# Altium PCB lcd_breakout.PcbDoc
Units mm, origin at the board's own origin, x right, y up, seen from the top; angles counter-clockwise.
Board outline 46.2 x 48.4 mm, 2 copper layers (Top Layer, Bottom Layer), stack 1.335 mm thick; 21 components, 20 nets, 74 pads, 11 vias.
Unrouted connection lines stored in the file: 21.
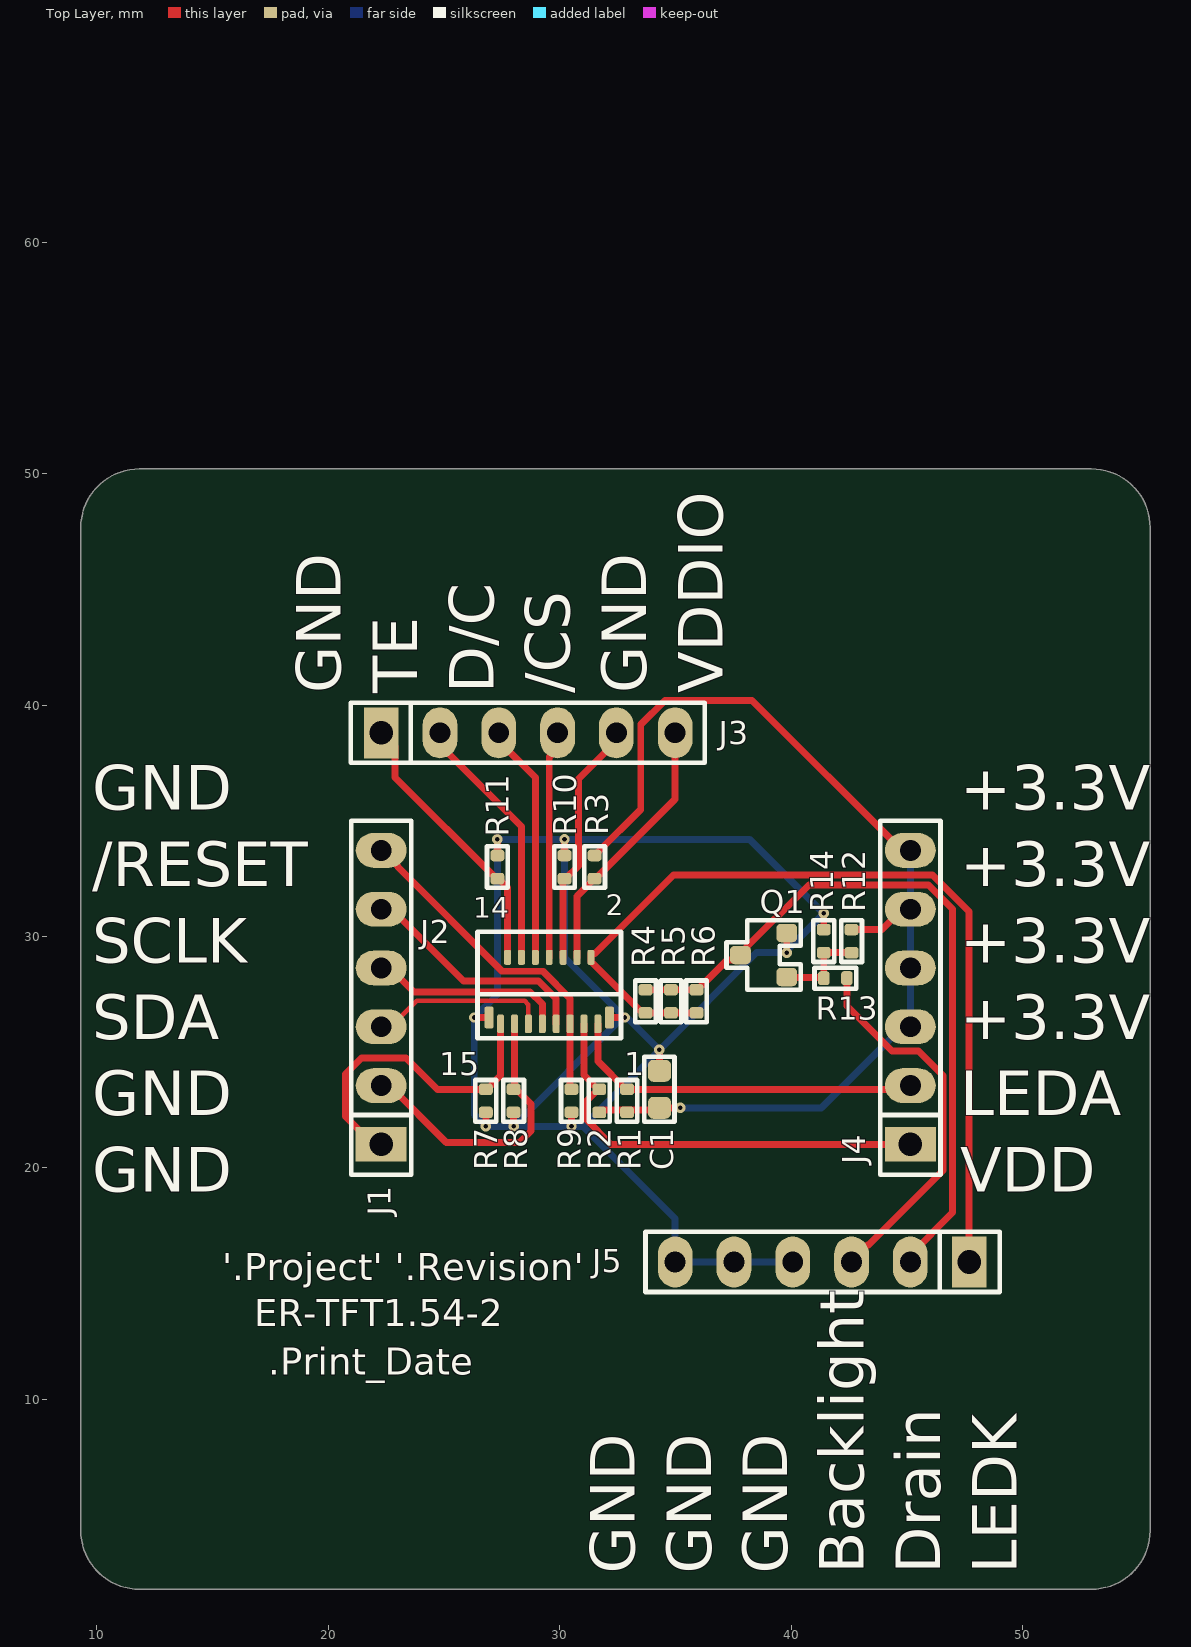
[diagram p0: Top Layer view]
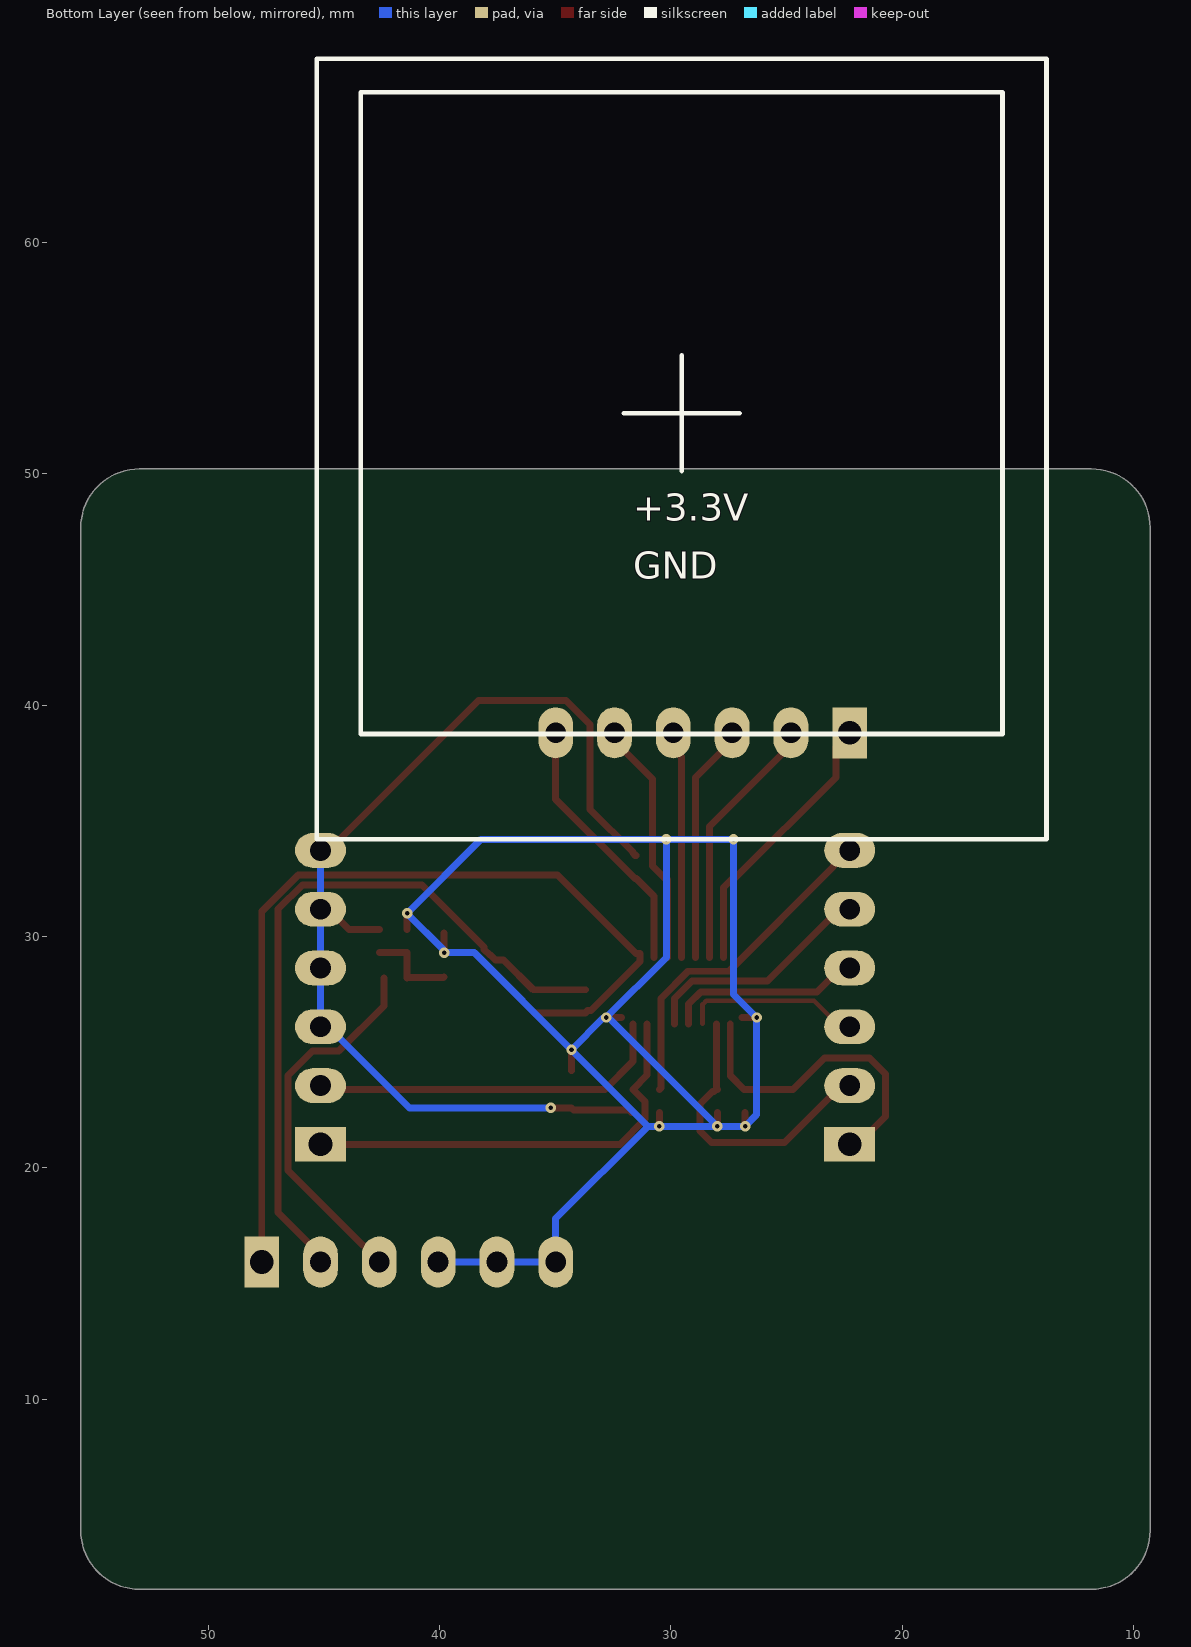
[diagram p1: Bottom Layer view, seen from below]
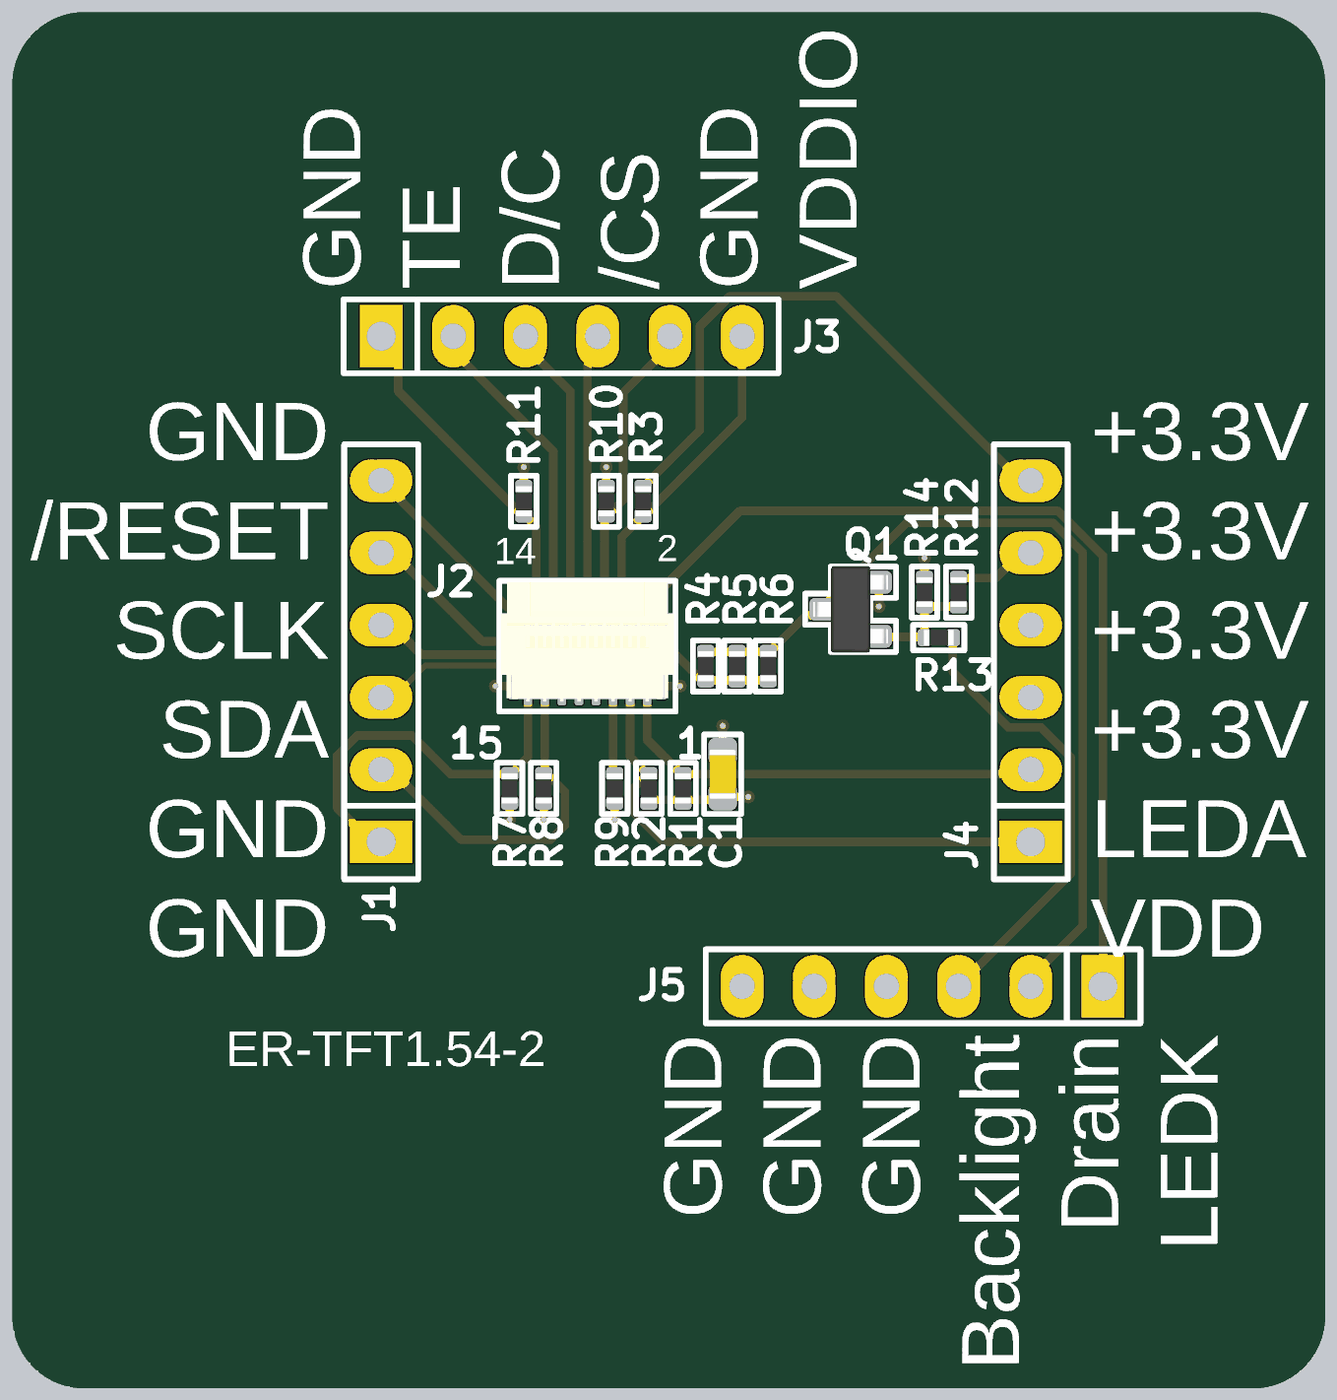
[diagram p2: 3D render of the assembled board from above, using the file's embedded part models]

## Layer stack, top to bottom
Top Solder: solder mask 0.0152, Solder Resist, Dk 3.8
Top Layer: signal copper 0.035
Core: core 1.265, FR-4, Dk 4.6
Bottom Layer: signal copper 0.035
Bottom Solder: solder mask 0.0152, Solder Resist, Dk 3.8

## Board outline
52.96,1.8 ccw(c52.96,4.34) 55.5,4.34 55.5,47.66 ccw(c52.96,47.66) 52.96,50.2 11.84,50.2 ccw(c11.84,47.66) 9.3,47.66 9.3,4.34 ccw(c11.84,4.34) 11.84,1.8

## Design rules (kind name [scope] priority, off if disabled: settings)
BoardOutlineClearance ignore_silkscreen [OnLayer('Top Overlay') OR OnLayer('Bottom Overlay')] p1: gap=0 ignorepadtopadclearanceinfootprint=FALSE
BoardOutlineClearance [All] p2: gap=0.2 ignorepadtopadclearanceinfootprint=FALSE
Clearance HV_clearance [InNetClass('HV')] p1: gap=0.1 ignorepadtopadclearanceinfootprint=TRUE except(0.5: Arc-Arc Arc-Track Arc-SMDPad Arc-THPad Arc-Via Arc-Fill Arc-Poly Arc-Region Arc-Text Arc-Hole Track-Track Track-SMDPad Track-THPad Track-Via Track-Fill Track-Poly Track-Region Track-Text Track-Hole; 1.2: SMDPad-SMDPad SMDPad-THPad THPad-THPad)
Clearance 24v_clearance [InNet('+24V') or InNet('NetJ1_2') or InNet('NetJ3_2')] p2: gap=0.3 ignorepadtopadclearanceinfootprint=TRUE
Clearance 12v_clearance [InNet('+12V') or InNet('+12V_SWITCHED') or InNet('VBUS')] p3: gap=0.2 ignorepadtopadclearanceinfootprint=TRUE
Clearance 5v_polygon_clearance_1 [(InNet('+5V') AND InPolygon)] p4: gap=0.254 ignorepadtopadclearanceinfootprint=FALSE
Clearance fiducial [HasFootprint('fiducial-0.5')] p5: gap=0.5 ignorepadtopadclearanceinfootprint=FALSE
Clearance outer_layer_clearance [OnLayer('Bottom Layer')   OR OnLayer('Top Layer')] p6: gap=0.127 ignorepadtopadclearanceinfootprint=TRUE except(0.152: Arc-THPad Arc-Via Arc-Text Arc-Hole Track-THPad Track-Via Track-Text Track-Hole SMDPad-SMDPad SMDPad-THPad SMDPad-Via SMDPad-Text SMDPad-Hole THPad-Text Via-Text Fill-Text Fill-Hole Poly-Text Poly-Hole Region-Text Region-Hole Text-Text Text-Hole; 0.231: Via-Hole; 0.356: THPad-THPad THPad-Via THPad-Hole)
Clearance inner_layer_clearance [All] p7: gap=0.152 ignorepadtopadclearanceinfootprint=TRUE except(0.102: Arc-Arc Arc-Track Track-Track; 0.127: Arc-Fill Arc-Poly Arc-Region Track-Fill Track-Poly Track-Region SMDPad-Fill SMDPad-Poly SMDPad-Region THPad-Fill THPad-Poly THPad-Region Via-Via Via-Fill Via-Poly Via-Region Fill-Fill Fill-Poly Fill-Region Poly-Poly Poly-Region Region-Region; 0.231: Via-Hole; 0.356: THPad-THPad THPad-Via THPad-Hole)
ComponentClearance fiducial_clearance [HasFootprint('FIDUCIAL')] p1: gap=0 collisioncheckmode=3 verticalgap=0 showdistances=FALSE
ComponentClearance [All] p2: gap=0.254 collisioncheckmode=3 verticalgap=0.254 showdistances=FALSE
DiffPairsRouting [All] p1: maxlimit=0.127 minlimit=0.127 mostfreqgap=0.127 toplayer_minwidth=0.179 toplayer_maxwidth=0.179 toplayer_prefwidth=0.383 bottomlayer_minwidth=0.179 bottomlayer_maxwidth=0.179 bottomlayer_prefwidth=0.383 impedanceprofiledriven=TRUE impedanceprofileid={7E14F61A-B919-4185-869E-9338D35A9579} impedanceprofilevalue=90.000000 maxuncoupledlength=12.7
HoleSize [All] p1: absolutevalues=TRUE maxlimit=6.3 minlimit=0.2 maxpercent=80.000 minpercent=20.000
HoleToHoleClearance via-to-via_clearance [IsVia] p1: gap=0.2 allowstackedmicrovias=TRUE
HoleToHoleClearance [All] p2: gap=0.35 allowstackedmicrovias=TRUE
MinimumAnnularRing usb-c [HasFootprint('USB_C_2.0_M12')] p1: minimumring=0.125
MinimumAnnularRing via_annular_ring [IsVia] p2: minimumring=0.1
MinimumAnnularRing annular_ring [All] p3: minimumring=0.2
MinimumSolderMaskSliver [All] p1: minsoldermaskwidth=0.046
PlaneConnect [All] p1: planeconnectstyle=Direct reliefexpansion=0.508 reliefentries=4 reliefconductorwidth=0.254 reliefairgap=0.254
PolygonConnect trinamic [InPadClass('thermal_pad')] p1: connectstyle=Direct reliefconductorwidth=0.254 reliefentries=4 polygonreliefangle="90 Angle" airgapwidth=0.254
PolygonConnect mounting_holes [HasFootprint('m3_hole')] p2: connectstyle=Direct reliefconductorwidth=0.254 reliefentries=4 polygonreliefangle="90 Angle" airgapwidth=0.254
PolygonConnect 5v_polygons [InNet('+5V')] p3: thpad.connectstyle=Relief thpad.reliefconductorwidth=0.508 thpad.reliefentries=4 thpad.polygonreliefangle="45 Angle" thpad.airgapwidth=0.254 smdpad.connectstyle=Relief smdpad.reliefconductorwidth=0.508 smdpad.reliefentries=4 smdpad.polygonreliefangle="90 Angle" smdpad.airgapwidth=0.254 via.connectstyle=Direct via.reliefconductorwidth=0.254 via.reliefentries=4 via.polygonreliefangle="90 Angle" via.airgapwidth=0.254
PolygonConnect [All] p4: thpad.connectstyle=Relief thpad.reliefconductorwidth=0.254 thpad.reliefentries=4 thpad.polygonreliefangle="45 Angle" thpad.airgapwidth=0.254 smdpad.connectstyle=Relief smdpad.reliefconductorwidth=0.254 smdpad.reliefentries=4 smdpad.polygonreliefangle="90 Angle" smdpad.airgapwidth=0.254 via.connectstyle=Direct via.reliefconductorwidth=0.254 via.reliefentries=4 via.polygonreliefangle="45 Angle" via.airgapwidth=0.254
RoutingVias [All] p1: holewidth=0.2 width=0.45 viastyle="Through Hole" minholewidth=0.2 minwidth=0.45 maxholewidth=0.3 maxwidth=3
SilkToSilkClearance [All] p1: silktosilkclearance=0
SilkToSolderMaskClearance [IsPad] p1: minsilkscreentomaskgap=0.075 clearancetoexposedcopper=TRUE
SolderMaskExpansion ViaTenting [IsVia] p1: expansion=0.05 istentingtop=TRUE
SolderMaskExpansion [All] p2: expansion=0.05 istentingtop=FALSE
SupplyNets "Schematic Supply Nets_3" [InNet('GND')] p1: voltage=0.000
SupplyNets "Schematic Supply Nets_1" [InNet('+3.3V')] p2: voltage=0.000
Width [All] p1: maxlimit=3 minlimit=0.089 preferedwidth=0.203
22 further rules are at their usual default settings.

## Components (designator, comment, footprint, x,y, rotation, side; value= is the part's Value field where it differs from the comment)
C1 "CL10A106MA8NRNC" 0603_capacitor 34.3,23.4 r270 top value=10µF
J1 "*" 69190-106HLF 22.28,26.1 r90 top
J2 "ER-TFT1.54-2 LCD" FH35C-15S-0.3SHW(50) 29.54,27.7 r0 top
J3 "*" 69190-106HLF 27.36,38.8 r0 top
J4 "*" 69190-106HLF 45.14,26.1 r90 top
J5 "*" 69190-106HLF 42.6,15.94 r180 top
Q1 "DMN3404L-7" SOT-23-3 38.8,29.2 r180 top
R1 "RMCF0402ZT0R00" 0402_resistor 32.9,22.9 r270 top
R2 "RMCF0402ZT0R00" 0402_resistor 31.7,22.9 r270 top
R3 "RMCF0402ZT0R00" 0402_resistor 31.5,33 r90 top
R4 "RMCF0402FT27R0" 0402_resistor 33.7,27.2 r90 top
R5 "RMCF0402FT27R0" 0402_resistor 34.8,27.2 r90 top
R6 "RMCF0402FT27R0" 0402_resistor 35.9,27.2 r90 top
R7 "RMCF0402ZT0R00" 0402_resistor 26.8,22.9 r90 top
R8 "RMCF0402ZT0R00" 0402_resistor 28,22.9 r90 top
R9 "RMCF0402ZT0R00" 0402_resistor 30.5,22.9 r90 top
R10 "RMCF0402ZT0R00" 0402_resistor 30.2,33 r270 top
R11 "RMCF0402ZT0R00" 0402_resistor 27.3,33 r270 top
R12 "RMCF0402FT10K0" 0402_resistor 42.6,29.8 r270 top
R13 "RMCF0402FT100R" 0402_resistor 41.9,28.2 r180 top
R14 "RMCF0402FT10K0" 0402_resistor 41.4,29.8 r90 top

## Footprints (in the part's own frame and the unit in brackets; to place one, negate y for a bottom-side part, rotate by r counter-clockwise, add the part's x,y. Pads: shape width x height; smd on the part's side, far side on the other; paste and mask are expansions set on the pad)
0402_resistor [mm] "Chip Resistor, 2-Leads, Body 1.00x0.50mm, IPC Medium Density"
  rrect50% 0.5x0.6 smd: 1(-0.5,0) 2(0.5,0)
  silkscreen extent -0.9,-0.45 0.9,0.45, body extent -0.53,-0.28 0.53,0.28, height 0.4
0603_capacitor [mm] "Chip Capacitor, 2-Leads, Body 1.60x0.80mm, IPC Medium Density"
  rrect50% 0.95x1 smd: 1(-0.8,0) 2(0.8,0)
  silkscreen extent -1.4,-0.65 1.4,0.65, body extent -0.87,-0.48 0.87,0.48, height 0.87
69190-106HLF [mm] "6-pin 0.1\" header"
  rect 1.5x2.2 hole 1.02: 1(-5.08,0)
  oval 1.5x2.2 hole 0.9: 2(-2.54,0) 3(0,0) 4(2.54,0) 5(5.08,0) 6(7.62,0)
  silkscreen extent -6.4,-1.3 8.9,1.3
FH35C-15S-0.3SHW(50) [mm] "Flat flex connector"
  rrect50% 0.3x0.8 smd: 1(2.1,-1.475) 3(1.5,-1.475) 5(0.9,-1.475) 7(0.3,-1.475) 9(-0.3,-1.475) 11(-0.9,-1.475) 13(-1.5,-1.475) 15(-2.1,-1.475)
  rrect50% 0.3x0.65 smd: 2(1.8,1.4) 4(1.2,1.4) 6(0.6,1.4) 8(0,1.4) 10(-0.6,1.4) 12(-1.2,1.4) 14(-1.8,1.4)
  rrect50% 0.4x0.95 smd: MP(-2.6,-1.2) MP(2.6,-1.2)
  silkscreen extent -3.1,-2.1 3.1,2.5, body extent -15.76,-6.5 15.76,40.22, height 1.9
SOT-23-3 [mm]
  rrect50% 0.9x0.8 smd: 1(-1,0.95) 2(-1,-0.95) 3(1,0)
  silkscreen extent -1.6,-1.5 1.6,1.5, body extent -1.32,-1.52 1.32,1.52, height 1.22

## Part data
C1: "10 µF, 25 V, X5R, 0603 Chip capacitor", Case Code (Imperial)=0603, Case Code (Metric)=1608, Manufacturer=Samsung, Max Operating Temperature=85°C, Min Operating Temperature=-55°C, Tolerance=20%, Voltage Rating=25V, Case/Package=0603, Category="Ceramic Capacitors", ComponentLink1Description=https://datasheet.ciiva.com/25766/cl10a106ma8nrnc-25766562.pdf?src-supplier=Digikey, ComponentLink1URL=https://datasheet.ciiva.com/25766/cl10a106ma8nrnc-25766562.pdf?src-supplier=Digikey, Height=900um, house_part_number=C-10uF-0603-002, Lead Free="Lead Free", Manufacturer Part Number=CL10A106MA8NRNC, Material=4241ConductorMaterial, Mounting Technology="Surface Mount", Packaging="Cut Tape", Pricing="4000=0.0511, 8000=0.046, 12000=0.0434, 28000=0.0413, 100000=0.0356 (USD)", RoHS=Yes, RoHS Compliant=Yes, Series=CL, Stock=632000, Supplier 1="Arrow Electronics", Supplier Part Number 1=CL10A106MA8NRNC
J1 J3 J4 J5: library part 69190-106HLF, "6-Pin 0.1\" unshrouded header pins", Flammability Rating="UL94 V-0", Insulation Color=Black, Manufacturer="Amphenol ICC / FCI", Manufacturer Series=69190, Supplier Part Number 1=649-69190-106HLF, Body Breadth=0.095inch, Body Depth=0.1inch, Body Length=0.6inch, Category=Connectors, ComponentLink1Description=https://datasheet.ciiva.com/721/69190-721132.pdf?src-supplier=Digikey, ComponentLink1URL=https://datasheet.ciiva.com/721/69190-721132.pdf?src-supplier=Digikey, Connector Type="BOARD CONNECTOR", Contact Finish - Termination="GOLD (30) OVER NICKEL/NICKEL PALLADIUM GOLD (30) OVER NICKEL", Contact Gender=Male, Contact Material=Bronze, Contact Pattern=RECTANGULAR, Contact Style="SQ PIN-SKT", DIN Conformance=No, Filter Feature=No, IEC Conformance=No, JESD-609 Code=e4, Manufacturer Part Number=69190-106HLF, Mating Contact Pitch=0.1inch, MIL Conformance=No, Mixed Contacts=No, Mounting Option 1=LOCKING, Mounting Style=STRAIGHT, Mounting Technology=Board, Number Of Connectors=1, Number of Contacts=6, Number Of PCB Rows=1, Number of Rows Loaded=1, Option="General Purpose", PCB Contact Pattern=RECTANGULAR, Plating Thickness=30uin, Pricing 1="1=0.67, 10=0.521, 50=0.521, 100=0.457, 1000=0.343, 10000=0.309 (USD)", Reach SVHC Compliant=Yes, Reference Standard=UL, Reliability=COMMERCIAL, RoHS=Yes, RoHS Compliant=Yes, Supplier 1=Mouser, Terminal Length=0.12inch, Terminal Pitch=2.54mm, Termination=Solder
J2: library part "LCD Connector", "ER-TFT1.54-2 1.54\" IPS LCD, 240x240, ST7789 controller, FH35C-15S-0.3SHW(50) connector", Contact Resistance=100mR, Dielectric Withstanding Voltage (AC)=90V, Insulation Resistance=50MR, Manufacturer=HRS, Manufacturer Part Number=FH35C-15S-0.3SHW(50), Max Operating Temperature=85°C, Min Operating Temperature=-55°C, Rated Current (Signal)=200mA, Supplier Part Number 1=26-FH35C-15S-0.3SHW(50)CT-ND, Body Breadth=0.035inch, Body Depth=0.132inch, Body Length=0.24inch, Category="FFC / FPC", ComponentLink1Description=https://datasheet.ciiva.com:443/pdfs/VipMasterIC/IC/HIRO/HIRO-S-A0001800865/HIRO-S-A0001800865-1.pdf?src-supplier=IHS+Markit, ComponentLink1URL=https://datasheet.ciiva.com:443/pdfs/VipMasterIC/IC/HIRO/HIRO-S-A0001800865/HIRO-S-A0001800865-1.pdf?src-supplier=IHS+Markit, ComponentLink2Description=https://datasheet.ciiva.com/29758/ed-fh35c-20140305-29758967.pdf?src-supplier=Digikey, ComponentLink2URL=https://datasheet.ciiva.com/29758/ed-fh35c-20140305-29758967.pdf?src-supplier=Digikey, Connector Type="CARD EDGE CONNECTOR", Contact Finish - Mating="AU ON NI", Contact Material=Bronze, Contact Pattern=STAGGERED, Contact Style="BELLOWED TYPE", Durability=10Cycles, Mating Contact Pitch=0.024inch, Mounting Option 1=LOCKING, Mounting Style="RIGHT ANGLE", Mounting Technology=Board, Number of Contacts=15, Number Of PCB Rows=2, Number of Rows Loaded=2, PCB Contact Pattern=STAGGERED, PCB Contact Row Spacing=2.8702mm, Pricing 1="1=1.87, 10=1.525, 25=1.4056, 50=1.3216, 100=1.2428, 250=1.14576, 500=1.07746, 1000=1.01326, 2500=0.9375 (USD)", Reliability=COMMERCIAL, RoHS Compliant=Yes, Stock 1=3489, Supplier 1=Digikey, Terminal Pitch=0.6096mm, Termination=SMD/SMT
Q1: "N-FET, 30 V, 5.8 A, SOT-23-3", Drain Current-Max (Abs) (ID)=5.8A, Drain-source On Resistance-Max=28mR, DS Breakdown Voltage-Min=30V, Manufacturer=Diodes, Max Operating Temperature=150°C, Operating Mode="ENHANCEMENT MODE", Package=SOT-23-3, Package Body Material=Plastic, Package Shape=Rectangular, Package Style="SMALL OUTLINEMeter", Peak Reflow Temperature (Cel)=260°C, Power Dissipation-Max (Abs)=1.4W, Pulsed Drain Current-Max (IDM)=30A, Supplier Part Number 1=DMN3404LDITR-ND, Time @ Peak Reflow Temperature-Max (s)=40s, Additional Feature="HIGH RELIABILITY", Category=MOSFETs, ComponentLink1Description=https://datasheet.ciiva.com:443/pdfs/VipMasterIC/IC/DIOD/DIODS20277/DIODS20277-1.pdf?src-supplier=IHS+Markit, ComponentLink1URL=https://datasheet.ciiva.com:443/pdfs/VipMasterIC/IC/DIOD/DIODS20277/DIODS20277-1.pdf?src-supplier=IHS+Markit, ComponentLink2Description=https://datasheet.ciiva.com/4444/ds31787-65102-4444489.pdf?src-supplier=Mouser, ComponentLink2URL=https://datasheet.ciiva.com/4444/ds31787-65102-4444489.pdf?src-supplier=Mouser, ComponentLink3Description=https://datasheet.ciiva.com/8115/ds31787-8115384.pdf?src-supplier=Avnet, ComponentLink3URL=https://datasheet.ciiva.com/8115/ds31787-8115384.pdf?src-supplier=Avnet, ComponentLink4Description=https://datasheet.ciiva.com/16508/ds31787-16508477.pdf?src-supplier=Future+Electronics, ComponentLink4URL=https://datasheet.ciiva.com/16508/ds31787-16508477.pdf?src-supplier=Future+Electronics, ComponentLink5Description=https://datasheet.ciiva.com/8023/ds31787-8023981.pdf?src-supplier=Element14, ComponentLink5URL=https://datasheet.ciiva.com/8023/ds31787-8023981.pdf?src-supplier=Element14, ComponentLink6Description=https://datasheet.ciiva.com/934/ds31787-934594.pdf?src-supplier=Digi-Key, ComponentLink6URL=https://datasheet.ciiva.com/934/ds31787-934594.pdf?src-supplier=Digi-Key, ComponentLink7Description=https://datasheet.ciiva.com/934/ds31787-934595.pdf?src-supplier=Digi-Key, ComponentLink7URL=https://datasheet.ciiva.com/934/ds31787-934595.pdf?src-supplier=Digi-Key, ComponentLink8Description=https://datasheet.ciiva.com/934/ds31787-934593.pdf?src-supplier=Digi-Key, ComponentLink8URL=https://datasheet.ciiva.com/934/ds31787-934593.pdf?src-supplier=Digi-Key, Drain Current-Max (ID)=5.8A, FET Technology="METAL-OXIDE SEMICONDUCTOR", JESD-30 Code=R-PDSO-G3, JESD-609 Code=e3, Manufacturer Part Number=DMN3404L-7, Moisture Sensitivity Level=1, Number of Elements=1, Pins=3, Polarity/Channel Type=N-CHANNEL, Pricing 1="3000=0.07535, 6000=0.06781, 15000=0.06028, 30000=0.05651, 75000=0.05011, 150000=0.04822 (USD)", Qualification Status="Not Qualified", Reach SVHC Compliant=Yes, RoHS=Yes, RoHS Compliant=Yes, Stock 1=150000, Supplier 1=Digi-Key, Surface Mount=Yes, Terminal Finish=Tin, Terminal Form="Gull Wing", Terminal Position=DUAL, Transistor Application=SWITCHING, Transistor Element Material=SILICON
R1 R2 R3 R7 R8 R9 R10 R11: "0 Ω, 0402 Jumper", Case Code (Imperial)=0402, Case Code (Metric)=1005, Current Rating=1A, Manufacturer="Stackpole Electronics", Max Operating Temperature=155°C, Max Power Dissipation=63mW, Min Operating Temperature=-55°C, Resistance=0Ω, Resistor Type="Thick Film", Supplier Part Number 1=RMCF0402ZT0R00CT-ND, Working Voltage=50V, Case/Package=0402, Category="Chip SMD Resistors", ComponentLink1Description=https://datasheet.ciiva.com/26835/getdatasheetpartid-409751-26835612.pdf?src-supplier=Verical, ComponentLink1URL=https://datasheet.ciiva.com/26835/getdatasheetpartid-409751-26835612.pdf?src-supplier=Verical, Construction=Rectangular, Contact Plating=Tin,Matte, Depth=0.5mm, Features="Automotive AEC-Q200", Height=0.016inch, house_part_number=JP-0402-001, Lead Free="Lead Free", Length=0.039inch, Manufacturer Part Number=RMCF0402ZT0R00, Military Standard=Not, Mount="Surface Mount", Number of Terminations=2, Packaging="Tape and Reel", Power Rating=63mW, Pricing 1="1=0.10000, 10=0.01000, 25=0.00720, 50=0.00560, 100=0.00410, 250=0.00316, 500=0.00252, 1000=0.00186, 5000=0.00133 (USD)", Radiation Hardening=No, RoHS=Yes, RoHS Compliant=Yes, Series=RMCF, Stock 1=6500003, Supplier 1=Digi-Key, Technology="THICK FILM", Width=0.02inch
R4 R5 R6: "27 Ω, 0402 Chip resistor", Manufacturer="Stackpole Electronics", Max Operating Temperature=155°C, Min Operating Temperature=-55°C, Package Height=0.3mm, Package Length=1mm, Package Shape=Rectangular, Package Style=SMTMeter, Package Width=0.5mm, Rated Power Dissipation (P)=63mW, Rated Temperature=70°C, Resistance=27Ω, Resistor Type="FIXED RESISTOR", Supplier Part Number 1=RMCF0402FT27R0CT-ND, Temperature Coefficient=100ppm/°C, Tolerance=1%, Working Voltage=50V, Category="Chip SMD Resistors", ComponentLink1Description=https://datasheet.ciiva.com:443/pdfs/VipMasterIC/IC/SEIE/SEIE-S-A0009541969/SEIE-S-A0009541969-1.pdf?src-supplier=IHS+Markit, ComponentLink1URL=https://datasheet.ciiva.com:443/pdfs/VipMasterIC/IC/SEIE/SEIE-S-A0009541969/SEIE-S-A0009541969-1.pdf?src-supplier=IHS+Markit, ComponentLink2Description=https://www.seielect.com/catalog/SEI-RMCF_RMCP.pdf?src-supplier=Avnet, ComponentLink2URL=https://www.seielect.com/catalog/SEI-RMCF_RMCP.pdf?src-supplier=Avnet, ComponentLink3Description=https://www.seielect.com/catalog/sei-rmcf_rmcp.pdf?src-supplier=Digi-Key, ComponentLink3URL=https://www.seielect.com/catalog/sei-rmcf_rmcp.pdf?src-supplier=Digi-Key, ComponentLink4Description=http://www.seielect.com/Catalog/SEI-RMCF_RMCP.pdf?src-supplier=Digi-Key, ComponentLink4URL=http://www.seielect.com/Catalog/SEI-RMCF_RMCP.pdf?src-supplier=Digi-Key, Construction=Rectangular, house_part_number=R-27-0402-1%-001, JESD-609 Code=e3, Manufacturer Part Number=RMCF0402FT27R0, Mount="Surface Mount", Number of Pins=2, Packaging="Tape and Reel", Pricing 1="1=0.10000, 10=0.01500, 100=0.00610, 1000=0.00274, 2500=0.00238, 5000=0.00197 (USD)", REACH SVHC=Yes, Reference Standard=AEC-Q200, RoHS=Yes, RoHS Compliant=Yes, Size Code=0402, Stock 1=3710, Supplier 1=Digi-Key, Technology="METAL GLAZE/THICK FILM", Terminal Finish=Nickel, Termination=Wraparound
R12 R14: "10 kΩ, 0402 Chip resistor", Case Code (Imperial)=0402, Case Code (Metric)=1005, Manufacturer="Stackpole Electronics", Max Operating Temperature=155°C, Max Power Dissipation=63mW, Min Operating Temperature=-55°C, Power Rating=62.5mW, Resistance=10kΩ, Resistor Type="Thick Film", Supplier Part Number 1=RMCF0402FT10K0CT-ND, Temperature Coefficient=100ppm/°C, Tolerance=1%, Case/Package=0402, Category="Chip SMD Resistors", ComponentLink1Description=https://datasheet.ciiva.com/24341/sei-rmcp-24341800.pdf?src-supplier=Onlinecomponents.com, ComponentLink1URL=https://datasheet.ciiva.com/24341/sei-rmcp-24341800.pdf?src-supplier=Onlinecomponents.com, Construction=Rectangular, Contact Plating=Tin,Matte, Depth=0.5mm, Features="Automotive AEC-Q200", Height=0.016inch, house_part_number=R-10k-0402-1%-001, Lead Free="Lead Free", Length=1mm, Manufacturer Part Number=RMCF0402FT10K0, Military Standard=Not, Mount="Surface Mount", Number of Terminations=2, Packaging="Tape and Reel", Pricing 1="1=0.10000, 10=0.01300, 100=0.00530, 1000=0.00239, 2500=0.00207, 5000=0.00171 (USD)", Radiation Hardening=No, RoHS=Yes, RoHS Compliant=Yes, Series=RMCF, Size Code=0402, Stock 1=7219214, Supplier 1=Digi-Key, Width=0.02inch
R13: "100 Ω, 0402 Chip resistor", Case Code (Imperial)=0402, Case Code (Metric)=1005, Manufacturer="Stackpole Electronics", Max Operating Temperature=155°C, Max Power Dissipation=63mW, Min Operating Temperature=-55°C, Power Rating=62.5mW, Resistance=100Ω, Resistor Type="Thick Film", Supplier Part Number 1=RMCF0402FT100RCT-ND, Temperature Coefficient=100ppm/°C, Tolerance=1%, Case/Package=0402, Category="Chip SMD Resistors", ComponentLink1Description=http://components.arrow.com/part/dataview/50497758S7215546N1174?src-supplier=Arrow+Electronics, ComponentLink1URL=http://components.arrow.com/part/dataview/50497758S7215546N1174?src-supplier=Arrow+Electronics, ComponentLink2Description=https://www.seielect.com/catalog/sei-rmcf_rmcp.pdf?src-supplier=Digi-Key, ComponentLink2URL=https://www.seielect.com/catalog/sei-rmcf_rmcp.pdf?src-supplier=Digi-Key, ComponentLink3Description=https://www.seielect.com/Catalog/SEI-RMCF_RMCP.pdf?src-supplier=Avnet, ComponentLink3URL=https://www.seielect.com/Catalog/SEI-RMCF_RMCP.pdf?src-supplier=Avnet, ComponentLink4Description=https://www.verical.com/server-webapp/html/getDatasheet?partID=368652&src-supplier=Verical, ComponentLink4URL=https://www.verical.com/server-webapp/html/getDatasheet?partID=368652&src-supplier=Verical, ComponentLink5Description=https://www.seielect.com/Catalog/SEI-RMCF_RMCP.pdf?src-supplier=Avnet+Asia, ComponentLink5URL=https://www.seielect.com/Catalog/SEI-RMCF_RMCP.pdf?src-supplier=Avnet+Asia, Construction=Rectangular, Contact Plating=Tin,Matte, Depth=0.5mm, Features="Automotive AEC-Q200", Height=0.016inch, house_part_number=R-100-0402-1%-001, Lead Free="Lead Free", Length=1mm, Manufacturer Part Number=RMCF0402FT100R, Military Standard=Not, Mount="Surface Mount", Number of Terminations=2, Packaging="Tape and Reel", Pricing 1="1=0.10000, 10=0.01300, 100=0.00530, 1000=0.00238, 2500=0.00207, 5000=0.00171 (USD)", RoHS=Yes, RoHS Compliant=Yes, Series=RMCF, Stock 1=188482, Supplier 1=Digi-Key, Width=0.02inch

## Via types
v1: diameter 0.45, hole 0.2, Top Layer to Bottom Layer, tented both sides, 11 vias

## Nets (pads, with @x,y where several pads share a name; then routed paths per layer and width w, separated by ;. In a path a pad name is that pad's centre, name@x,y a point inside that pad or via, vN(x,y) a via of type N, cw(c..) or ccw(c..) an arc to the next point about the centre after c; other vN are vias at no path point)
+3.3V: C1.2 J4.3 J4.4 J4.5 J4.6 R1.2 R2.2 R3.2 R12.1 | length 46.8
  Top Layer w0.3: R3.2 31.55,33.5 31.65,33.6 31.65,33.65 33.492,35.492 33.492,39.151 34.544,40.202 38.308,40.202 44.79,33.72 J4.6 ; R2.2 31.8,22.5 34.2,22.5 C1.2 v1(35.2,22.6) ; R12.1 43.91,30.3 44.79,31.18 J4.5
  Bottom Layer w0.3: v1(35.2,22.6) 41.29,22.6 44.79,26.1 J4.3 J4.6
\LCD_CS: J2.8 J3.4 | length 9.8
  Top Layer w0.3: J2.8 29.54,37.765 29.9,38.125 J3.4
\LCD_RESET: J1.5 J2.7 | length 10.3
  Top Layer w0.3: J1.5 22.72,31.18 25.829,28.071 29.084,28.071 29.84,27.315 J2.7
GND: C1.1 J2.MP J5.4 J5.5 J5.6 Q1.2 R7.1 R8.1 R9.1 R10.1 R11.1 R14.2 | length 84.1
  Top Layer w0.3: v1(26.3,26.5) J2.MP@26.94,26.5 ; v1(26.8,21.8) R7.1 ; R11.1 v1(27.3,34.2) ; v1(28,21.8) R8.1 ; R10.1 v1(30.2,34.2) ; v1(30.5,21.8) R9.1 ; J2.MP@32.14,26.5 v1(32.8,26.5) ; C1.1 v1(34.3,25.1) ; v1(39.8,29.3) Q1.2 ; R14.2 v1(41.4,31)
  Bottom Layer w0.3: J5.4 J5.5 J5.6 34.98,17.82 31,21.8 ; v1(28,21.8) 32.671,26.471 32.771,26.471 v1(32.8,26.5) ; v1(28,21.8) v1(30.5,21.8) 31,21.8 ; v1(28,21.8) v1(26.8,21.8) 26.3,22.3 v1(26.3,26.5) 27.3,27.5 v1(27.3,34.2) v1(30.2,34.2) ; v1(30.2,34.2) 38.2,34.2 v1(41.4,31) 39.829,29.429 39.829,29.329 v1(39.8,29.3) 38.5,29.3 v1(34.3,25.1) ; v1(30.2,34.2) 30.2,29.1 v1(32.8,26.5) ; 31,21.8 v1(34.3,25.1) ; v1(32.8,26.5) 32.829,26.471 32.929,26.471 v1(34.3,25.1)
LCD_BACKLIGHT: J5.3 R13.1 | length 16.3
  Top Layer w0.3: R13.1 42.4,27.002 44.354,25.048 45.491,25.048 46.542,23.996 46.542,19.882 43.324,16.664 43.298,16.664 42.6,15.965 J5.3
LCD_D/C: J2.10 J3.3 | length 10.4
  Top Layer w0.3: J3.3 27.36,38.45 28.94,36.87 J2.10
LCD_SCLK: J1.4 J2.9 | length 8.5
  Top Layer w0.3: J1.4 22.66,28.64 23.7,27.6 28.715,27.6 29.24,27.075 J2.9
LCD_SDA: J1.3 J2.11 | length 7.7
  Top Layer w0.2: J1.3 22.7,26.1 23.823,27.223 28.477,27.223 28.64,27.06 J2.11
LCD_TE: J2.12 J3.2 | length 11.2
  Top Layer w0.3: J3.2 24.82,38.28 28.34,34.76 J2.12
NetJ1_1: J1.1 J2.15 R7.2 | length 13.9
  Top Layer w0.3: J1.1 21.93,21.02 20.73,22.22 20.73,24.057 21.433,24.76 23.361,24.76 24.721,23.4 R7.2 ; R7.2@26.85,23.4 27.44,23.99 J2.15
NetJ1_2: J1.2 J2.13 R8.2 | length 12.7
  Top Layer w0.3: J1.2 22.63,23.56 25.09,21.1 28.255,21.1 28.75,21.595 28.75,22.763 28.213,23.3 28.15,23.3 28.05,23.4 R8.2 ; R8.2@28.04,23.44 J2.13
NetJ1_6: J1.6 J2.5 R9.2 | length 14.8
  Top Layer w0.3: J1.6 22.305,33.72 23.004,33.022 23.004,32.996 27.502,28.498 29.261,28.498 30.44,27.319 30.44,23.46 R9.2
NetJ2_1: J2.1 J4.2 R1.1 | length 15.7
  Top Layer w0.3: J2.1 31.64,24.61 32.85,23.4 R1.1 44.98,23.4 J4.2
NetJ2_2: J2.2 J5.1 R4.1 R5.1 R6.1 | length 39.4
  Top Layer w0.3: R6.1 R5.1 R4.1 33.6,26.8 33.465,26.8 31.34,28.925 31.34,29.275 31.515,29.275 34.899,32.659 46.103,32.659 47.68,31.082 J5.1
NetJ2_3: J2.3 J4.1 R2.1 | length 19.1
  Top Layer w0.3: J2.3 31.04,24.01 31.65,23.4 31.123,22.873 31.123,22.108 32.211,21.02 J4.1
NetJ2_4: J2.4 J3.6 R3.1 | length 11.4
  Top Layer w0.3: J2.4 30.74,29.319 30.74,31.74 R3.1 ; R3.1@31.55,32.5 34.98,35.93 J3.6
NetJ2_6: J2.6 J3.5 R10.2 | length 10.6
  Top Layer w0.3: J2.6 30.14,32.44 R10.2 ; R10.2@30.25,32.5 30.8,33.05 30.8,36.81 32.44,38.45 J3.5
NetJ2_14: J2.14 J3.1 R11.2 | length 12
  Top Layer w0.3: J3.1 22.88,38.2 22.88,36.87 27.25,32.5 R11.2 27.35,32.5 27.74,32.11 J2.14
NetJ5_2: J5.2 Q1.3 R4.2 R5.2 R6.2 | length 31.6
  Top Layer w0.3: R4.2 R5.2 R6.2 35.95,27.7 37.231,28.981 37.581,28.981 Q1.3 37.823,29.2 38.069,29.446 38.069,29.544 40.758,32.232 45.926,32.232 46.969,31.189 46.969,18.069 45.14,16.24 J5.2
NetQ1_1: Q1.1 R12.2 R13.2 R14.1 | length 3.9
  Top Layer w0.3: Q1.1 39.825,28.225 41.375,28.225 R13.2 R14.1 R12.2

## Silkscreen, mask and mechanical layers (free items; w line width, h text height)
Top Overlay:
  text "GND / TE / D/C / /CS / GND / VDDIO" at 37.681,40.5 h3.3 r90
  text "2" at 31.982,30.618 h1.5
  text "14" at 26.26,30.518 h1.5
  text "GND / /RESET / SCLK / SDA / GND / GND" at 9.803,18.319 h3.3
  text "+3.3V / +3.3V / +3.3V / +3.3V / LEDA / VDD" at 47.3,18.319 h3.3
  text "'.Project' '.Revision'" at 15.406,14.76 h2
  text "ER-TFT1.54-2" at 16.807,12.769 h2
  text ".Print_Date" at 17.395,10.669 h2
  text "GND / GND / GND / Backlight / Drain / LEDK" at 50.381,2.465 h3.3 r90
Bottom Overlay:
  text "+3.3V" at 31.64,47.569 h2
  text "GND" at 31.64,45.06 h2

## Text inside footprints (layer, text, board x,y; h text height)
J2: Top Overlay "15" at 24.79,24 h1; Top Overlay "1" at 32.773,24 h1